# Altium PCB DRVS-PCB.PcbDoc (part 2 of 3)
Units mm, origin at the board's own origin, x right, y up, seen from the top; angles counter-clockwise.
Board outline 50.67 x 58.05 mm, 4 copper layers (Top Layer, Layer 1, Layer 2, Bottom Layer), stack 1.553 mm thick; 72 components, 76 nets, 302 pads, 127 vias.
Unrouted connection lines stored in the file: 20.
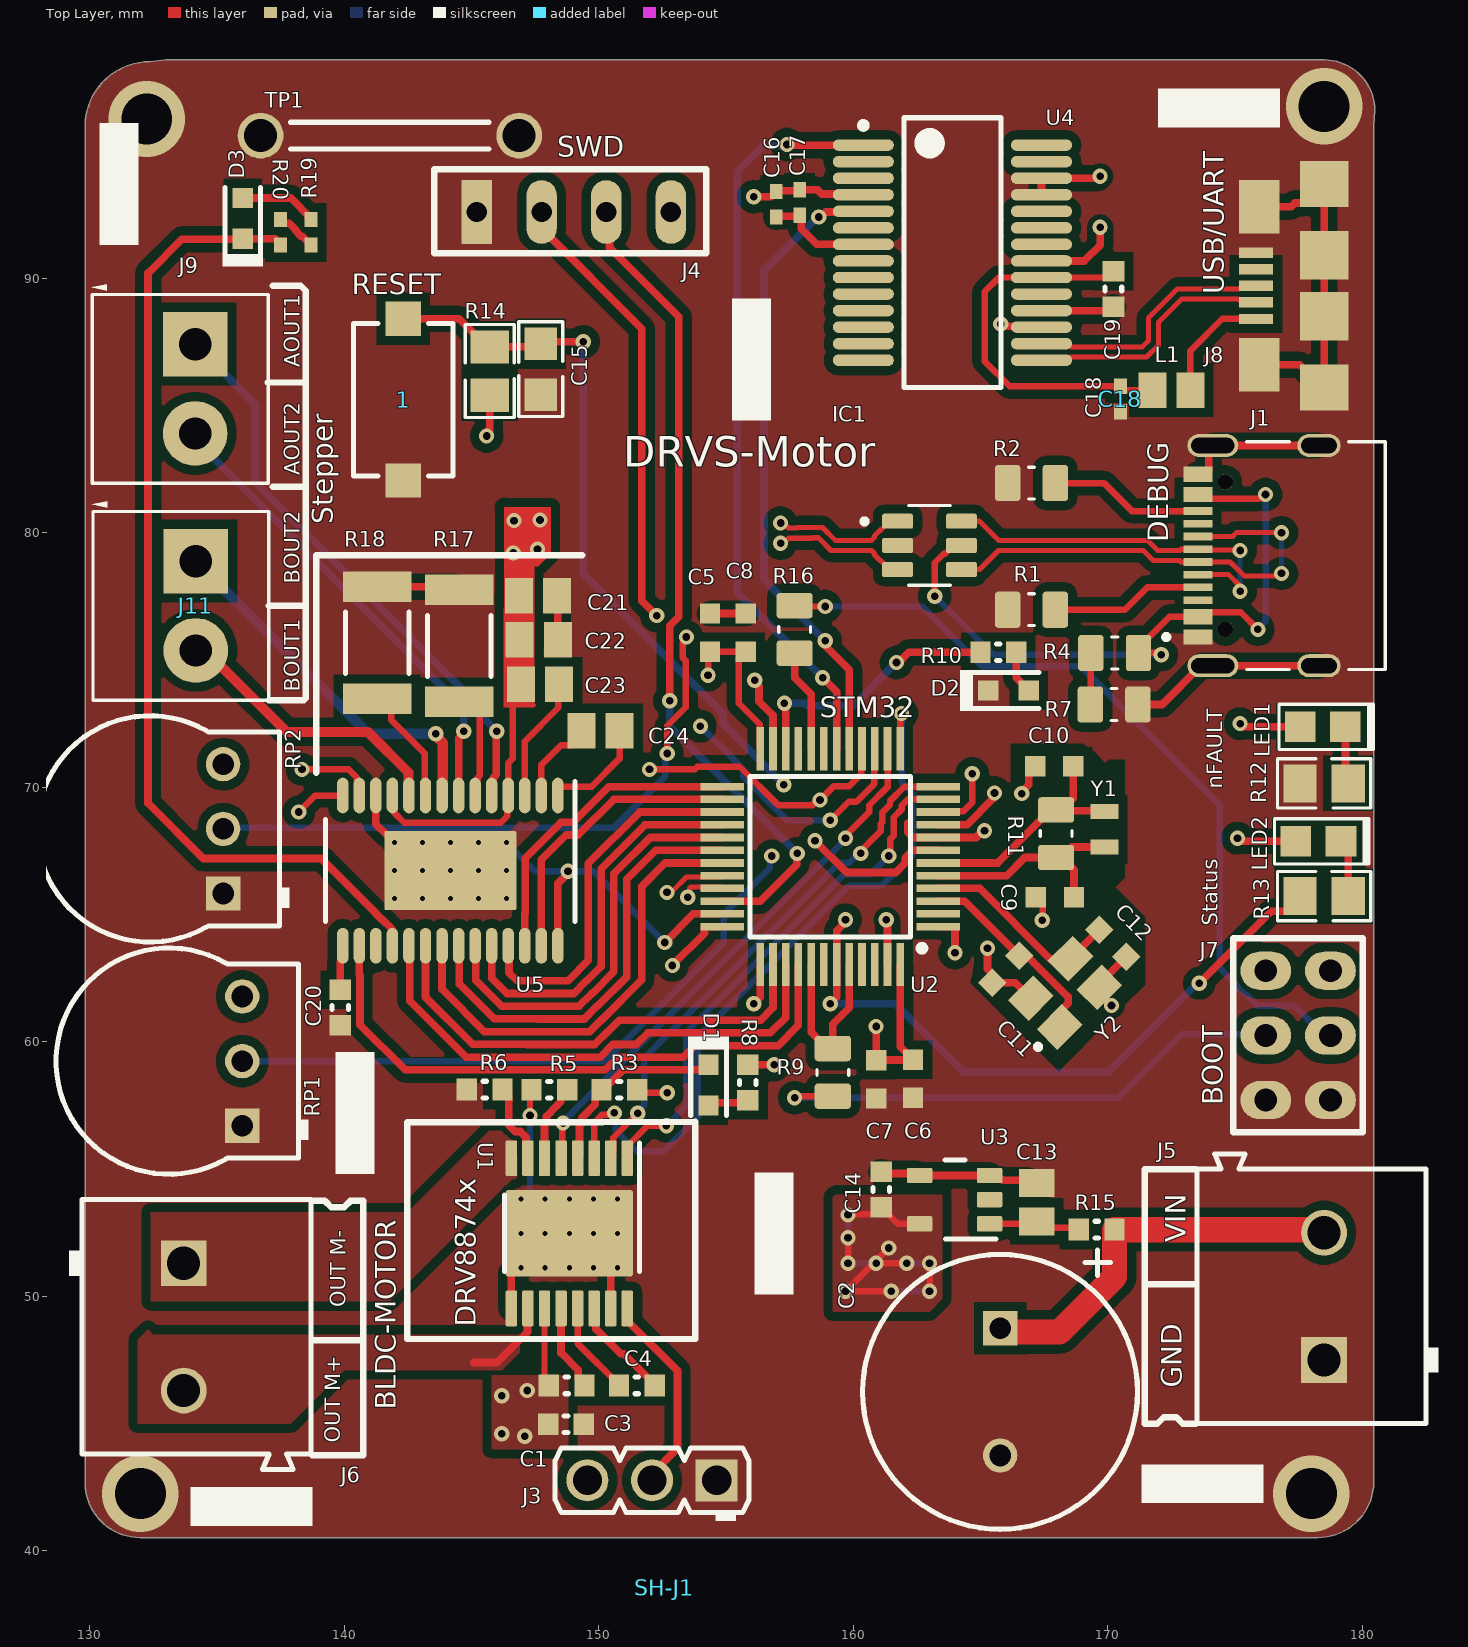
[diagram p0: Top Layer view]

## Via types
v1: diameter 0.6, hole 0.3, Top Layer to Bottom Layer, 93 vias
v2: diameter 0.5, hole 0.2, Top Layer to Bottom Layer, 18 vias
v3: diameter 0.5, hole 0.2, Top Layer to Bottom Layer, tented both sides, 12 vias
v4: diameter 3, hole 2, Top Layer to Bottom Layer, 4 vias

## Nets (pads, with @x,y where several pads share a name; then routed paths per layer and width w, separated by ;. In a path a pad name is that pad's centre, name@x,y a point inside that pad or via, vN(x,y) a via of type N, cw(c..) or ccw(c..) an arc to the next point about the centre after c; other vN are vias at no path point) (continued)
BOOT0: (continued)
  Top Layer w0.254: v1(157.7,57.8) 157.765,57.865 R9.2@159.2,57.865
  Bottom Layer w0.254: v1(157.7,57.8) 170.4,57.8 172.9,60.3 176.16,60.3 J7.3@176.21,60.25